# Altium PCB Orient.PcbDoc (part 3 of 4)
Units mil, origin at the board's own origin, x right, y up, seen from the top; angles counter-clockwise.
Board outline 3600 x 2400 mil, 4 copper layers (Top Layer, Layer 1, Layer 2, Bottom Layer), stack 23.756 mil thick; 365 components, 303 nets, 1656 pads, 303 vias.
Unrouted connection lines stored in the file: 1026.
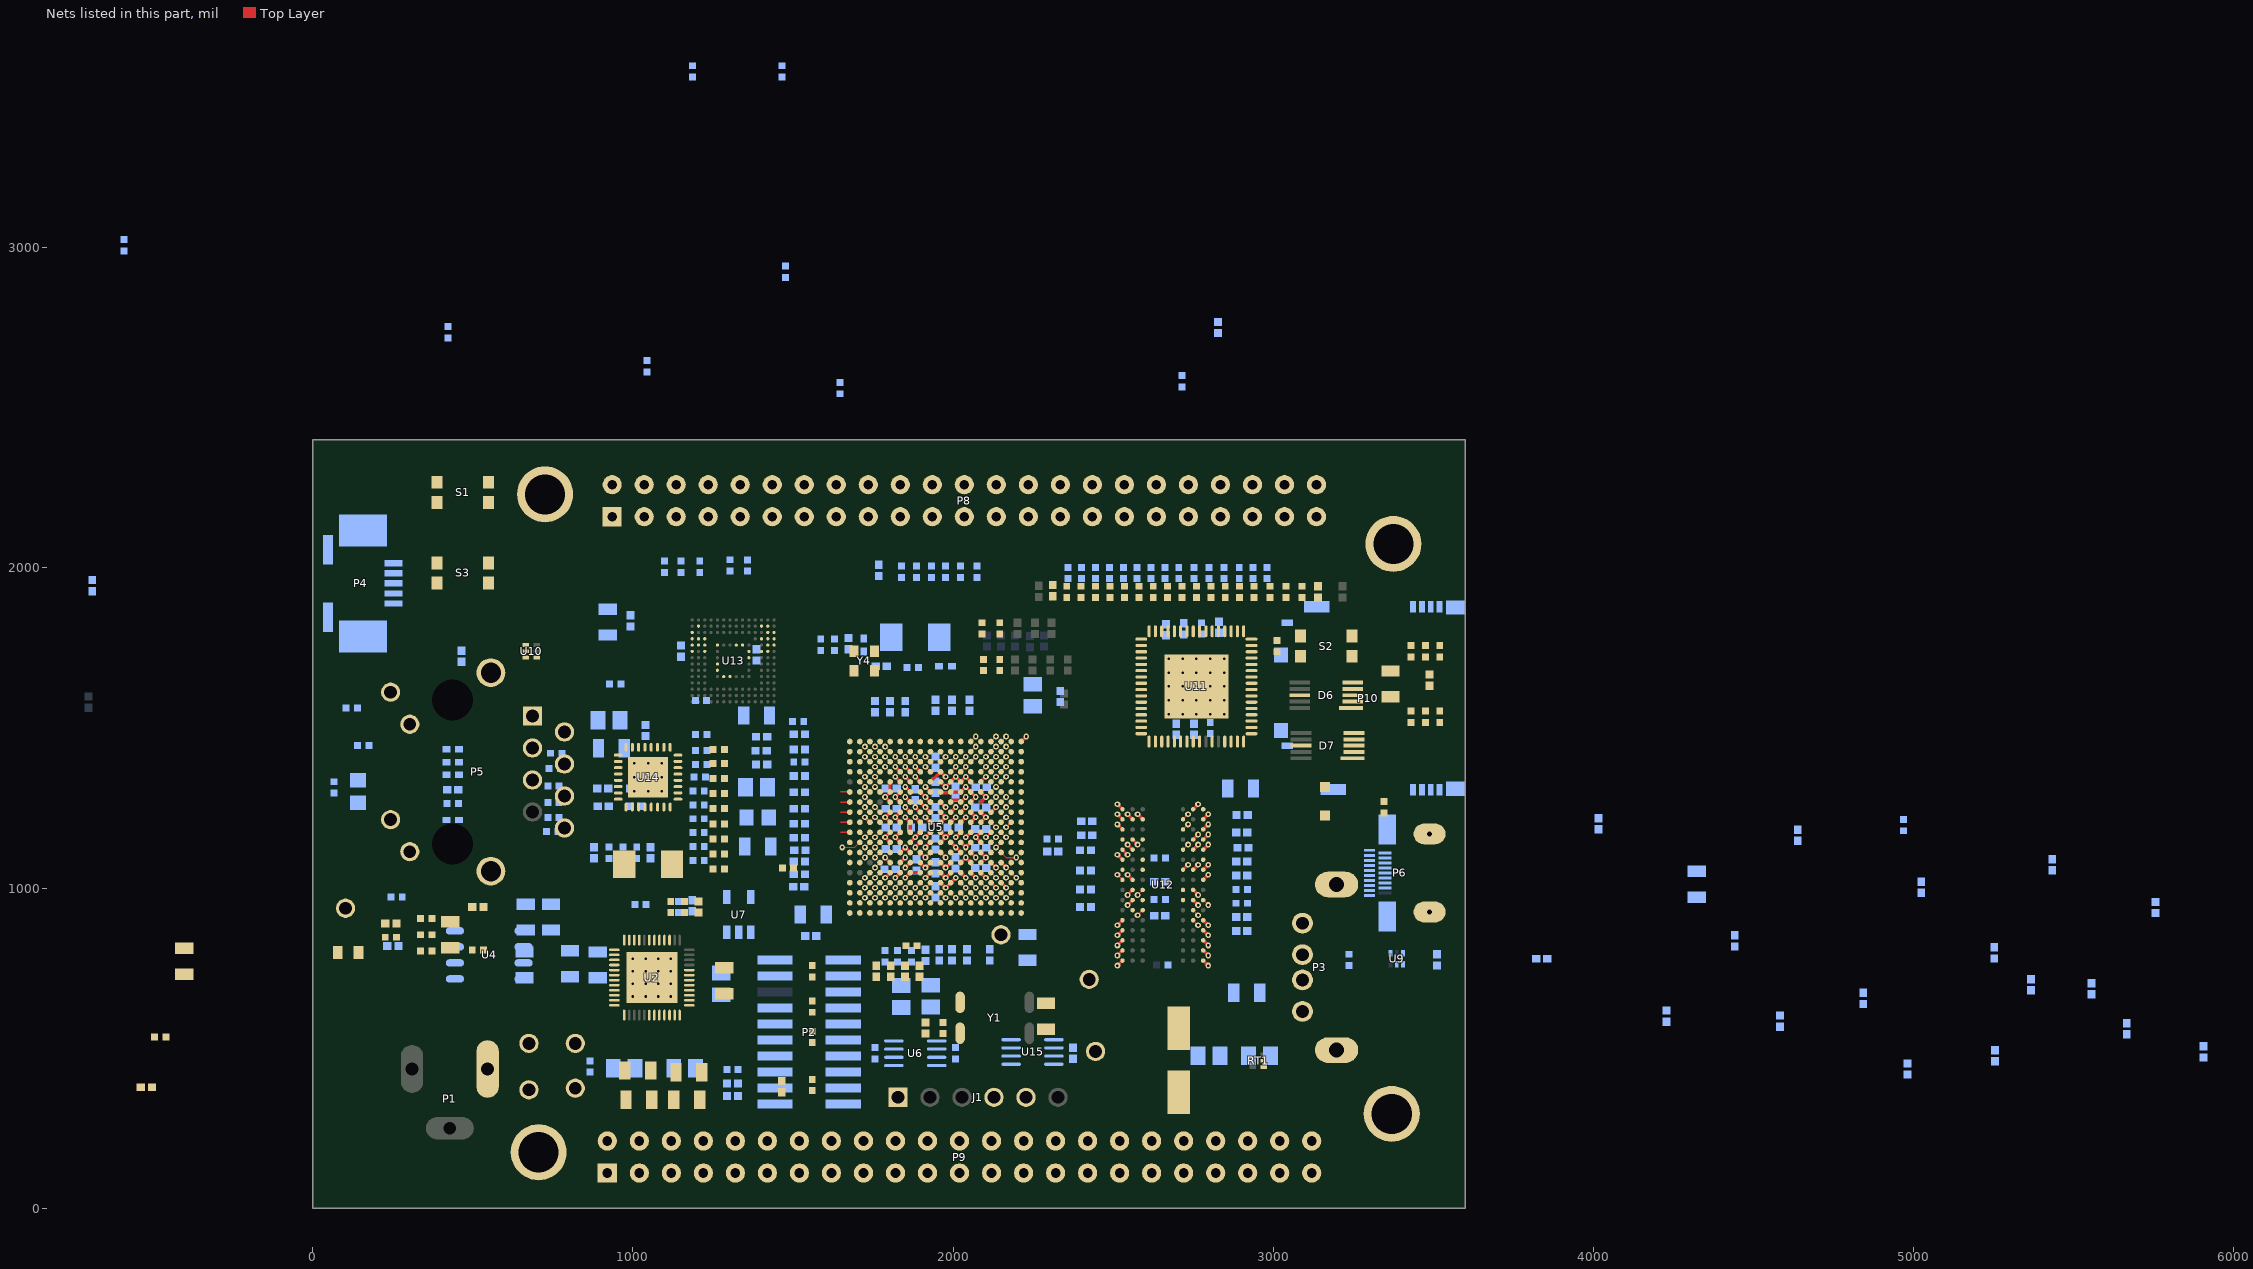
[diagram p4: the nets of this part, all layers, seen from the top]

## Part data (continued)
C16 C17 C18: library part CAP_2.2uF, "MLCC 2.2uF 0402 SMD", Capacitance=2.2uF, Case/Package=0402, Case Code (Metric)=1005, Dielectric=X5R, Dielectric Material=Ceramic, Manufacturer=TDK, Max Operating Temperature=85°C, Min Operating Temperature=-55°C, Package Quantity=1, Tolerance=10%, Voltage=6.3V, Case Code (Imperial)=0402, ComponentLink7Description=Datasheet, ComponentLink7URL=https://product.tdk.com/info/en/catalog/datasheets/mlcc_commercial_general_en.pdf?ref_disty=digikey, Composition=Ceramic, Depth=0.5mm, Height=0.5mm, Lead Free="Lead Free", Length=1mm, Manufacturer Part Number=C1005X5R0J225K050BC, Mount="Surface Mount", Number of Pins=2, Packaging="Tape and Reel", Pricing 1="1=0.20000, 10=0.13800, 100=0.07010, 500=0.04794, 1000=0.04240, 2500=0.04056, 5000=0.03687 (USD)", Radiation Hardening=No, REACH SVHC="No SVHC", RoHS=Yes, Stock 1=256055, Supplier 1=Digi-Key, Termination=SMD/SMT, Thickness=0.022inch, Voltage Rating=6.3V, Voltage Rating (DC)=6.3V, Weight=2.3E-05oz, Width=0.02inch
C17: library part CAP_POL_100uF, "POL CAP 100uF SMD", Capacitance=100uF, Case/Package=Radial, Dielectric Material=Aluminium, Leakage Current=3uA, Manufacturer=Panasonic, Max Operating Temperature=85°C, Min Operating Temperature=-40°C, Package Quantity=1, Ripple Current=71mA, Supplier Part Number 1=PCE3852CT-ND, Tolerance=20%, Voltage=6.3V, ComponentLink1Description=https://datasheet.ciiva.com/11779/0900766b8078636e-11779744.pdf?src-supplier=RSComponents, ComponentLink1URL=https://datasheet.ciiva.com/11779/0900766b8078636e-11779744.pdf?src-supplier=RSComponents, ComponentLink2Description=https://datasheet.ciiva.com/14610/70255710-14610022.pdf?src-supplier=Allied+Electronics, ComponentLink2URL=https://datasheet.ciiva.com/14610/70255710-14610022.pdf?src-supplier=Allied+Electronics, ComponentLink3Description=https://datasheet.ciiva.com/30226/11aba0000ce2-30226184.pdf?src-supplier=Onlinecomponents.com, ComponentLink3URL=https://datasheet.ciiva.com/30226/11aba0000ce2-30226184.pdf?src-supplier=Onlinecomponents.com, ComponentLink4Description=https://datasheet.ciiva.com/16397/aba0000ce2-16397066.pdf?src-supplier=Future+Electronics, ComponentLink4URL=https://datasheet.ciiva.com/16397/aba0000ce2-16397066.pdf?src-supplier=Future+Electronics, ComponentLink5Description=https://datasheet.ciiva.com/46387/aba0000ce2-46387964.pdf?src-supplier=Element14, ComponentLink5URL=https://datasheet.ciiva.com/46387/aba0000ce2-46387964.pdf?src-supplier=Element14, ComponentLink6Description=https://datasheet.ciiva.com/14595/70255710-14595757.pdf?src-supplier=Allied+Electronics, ComponentLink6URL=https://datasheet.ciiva.com/14595/70255710-14595757.pdf?src-supplier=Allied+Electronics, ComponentLink7Description=https://datasheet.ciiva.com/2983/aba0000ce2-2983902.pdf?src-supplier=Avnet, ComponentLink7URL=https://datasheet.ciiva.com/2983/aba0000ce2-2983902.pdf?src-supplier=Avnet, ComponentLink8Description=https://datasheet.ciiva.com/43485/aba0000ce2-43485605.pdf?src-supplier=Farnell, ComponentLink8URL=https://datasheet.ciiva.com/43485/aba0000ce2-43485605.pdf?src-supplier=Farnell, ComponentLink9Description=https://datasheet.ciiva.com/24070/aba0000ce2-40801-24070230.pdf?src-supplier=Mouser, ComponentLink9URL=https://datasheet.ciiva.com/24070/aba0000ce2-40801-24070230.pdf?src-supplier=Mouser, ComponentLink10Description=https://datasheet.ciiva.com/46376/aba0000ce2-46376375.pdf?src-supplier=Element14, ComponentLink10URL=https://datasheet.ciiva.com/46376/aba0000ce2-46376375.pdf?src-supplier=Element14, ComponentLink11Description=https://datasheet.ciiva.com/6134/aba0000ce2-6134361.pdf?src-supplier=Farnell, ComponentLink11URL=https://datasheet.ciiva.com/6134/aba0000ce2-6134361.pdf?src-supplier=Farnell, ComponentLink12Description=https://datasheet.ciiva.com/16539/aba0000ce2-16539929.pdf?src-supplier=Avnet+Asia, ComponentLink12URL=https://datasheet.ciiva.com/16539/aba0000ce2-16539929.pdf?src-supplier=Avnet+Asia, ComponentLink13Description=https://datasheet.ciiva.com/15165/getdatasheetpartid-73778-15165850.pdf?src-supplier=Verical, ComponentLink13URL=https://datasheet.ciiva.com/15165/getdatasheetpartid-73778-15165850.pdf?src-supplier=Verical, ComponentLink14Description=https://datasheet.ciiva.com/17353/aba0000ce2-17353295.pdf?src-supplier=Avnet+Europe, ComponentLink14URL=https://datasheet.ciiva.com/17353/aba0000ce2-17353295.pdf?src-supplier=Avnet+Europe, Contact Plating=Tin, Diameter=6.3mm, Features="General Purpose", Height=5.4mm, Height - Seated (Max)=0.213inch, Lead Free="Lead Free", Lead Length=2.6mm, Lead Pitch=2.2mm, Length=5.5mm, Life (Hours)=2000Hour, Manufacturer Part Number=EEE-0JA101SP, Mount="Surface Mount,PCB", Number of Pins=2, Packaging="Tape and Reel", Pricing 1="1=0.35000, 10=0.24000, 100=0.14420, 500=0.10816 (USD)", Radiation Hardening=No, REACH SVHC="No SVHC", Ripple Current (AC)=71mA, RoHS=Yes, Stock 1=67789, Supplier 1=Digi-Key, Termination=SMD/SMT, Voltage Rating=6.3V, Voltage Rating (DC)=6.3V, Width=6.6mm
C19: library part CAP_470pF, "MLCC 470pF 0402 SMD", Capacitance=470pF, Case/Package=0402, Case Code (Metric)=1005, Dielectric=X7R, Manufacturer=Murata, Max Operating Temperature=125°C, Min Operating Temperature=-55°C, Package Quantity=1, Supplier Part Number 1=490-1300-1-ND, Tolerance=10%, Voltage=50V, Case Code (Imperial)=0402, ComponentLink1Description=https://datasheet.ciiva.com/11786/0900766b80ef921d-11786912.pdf?src-supplier=RSComponents, ComponentLink1URL=https://datasheet.ciiva.com/11786/0900766b80ef921d-11786912.pdf?src-supplier=RSComponents, ComponentLink2Description=https://datasheet.ciiva.com/18101/getdatasheetpartid-37722-18101030.pdf?src-supplier=Verical, ComponentLink2URL=https://datasheet.ciiva.com/18101/getdatasheetpartid-37722-18101030.pdf?src-supplier=Verical, ComponentLink3Description=https://datasheet.ciiva.com/19476/1856505-19476137.pdf?src-supplier=Jameco, ComponentLink3URL=https://datasheet.ciiva.com/19476/1856505-19476137.pdf?src-supplier=Jameco, ComponentLink4Description=https://datasheet.ciiva.com/29199/454340-da-01-en-vs-kondensator-0402-29199656.pdf?src-supplier=Conrad, ComponentLink4URL=https://datasheet.ciiva.com/29199/454340-da-01-en-vs-kondensator-0402-29199656.pdf?src-supplier=Conrad, ComponentLink5Description=https://datasheet.ciiva.com/129/partnumbering-e-01-129843.pdf?src-supplier=Digi-Key, ComponentLink5URL=https://datasheet.ciiva.com/129/partnumbering-e-01-129843.pdf?src-supplier=Digi-Key, ComponentLink6Description=https://datasheet.ciiva.com/129/partnumbering-e-01-129844.pdf?src-supplier=Digi-Key, ComponentLink6URL=https://datasheet.ciiva.com/129/partnumbering-e-01-129844.pdf?src-supplier=Digi-Key, ComponentLink7Description=https://datasheet.ciiva.com/129/partnumbering-e-01-129845.pdf?src-supplier=Digi-Key, ComponentLink7URL=https://datasheet.ciiva.com/129/partnumbering-e-01-129845.pdf?src-supplier=Digi-Key, ComponentLink8Description=https://datasheet.ciiva.com/14116/grmseries-highdielectrictype-eng-14116837.pdf?src-supplier=Distrelec, ComponentLink8URL=https://datasheet.ciiva.com/14116/grmseries-highdielectrictype-eng-14116837.pdf?src-supplier=Distrelec, ComponentLink9Description=https://datasheet.ciiva.com/22698/608985-22698425.pdf?src-supplier=Element14, ComponentLink9URL=https://datasheet.ciiva.com/22698/608985-22698425.pdf?src-supplier=Element14, ComponentLink10Description=https://datasheet.ciiva.com/16199/product-16199180.pdf?src-supplier=Future+Electronics, ComponentLink10URL=https://datasheet.ciiva.com/16199/product-16199180.pdf?src-supplier=Future+Electronics, ComponentLink11Description=https://datasheet.ciiva.com/7937/608985-7937630.pdf?src-supplier=Element14, ComponentLink11URL=https://datasheet.ciiva.com/7937/608985-7937630.pdf?src-supplier=Element14, Depth=0.5mm, Height=0.5mm, Lead Free="Lead Free", Length=1mm, Manufacturer Part Number=GRM155R71H471KA01D, Material=Ceramic, Mount="Surface Mount", Number of Pins=2, Packaging="Tape and Reel", Pricing 1="1=0.10000, 10=0.04900, 100=0.02200, 500=0.01572, 1000=0.01235, 2500=0.01122, 5000=0.01033 (USD)", Radiation Hardening=No, REACH SVHC="No SVHC", RoHS=Yes, Stock 1=1824670, Supplier 1=Digi-Key, Termination=SMD/SMT, Thickness=0.022inch, Voltage Rating=50V, Voltage Rating (DC)=50V, Width=0.02inch
C21 C22 C25: library part CAP_18pF, "CAP CER 18PF 50V 5% NP0 0402", Capacitance=18pF, Manufacturer="TDK Corporation", Manufacturer Part Number=C1005C0G1H180J050BA, Operating Temperature="-55°C ~ 125°C", Package / Case="0402 (1005 Metric)", Ratings=-, Supplier Part Number 1=445-1238-6-ND, Temperature Coefficient="C0G, NP0", Tolerance=±5%, Voltage - Rated=50V, Applications="General Purpose", Category=Capacitors, ComponentLink1Description=http://product.tdk.com/capacitor/mlcc/en/documents/mlcc_commercial_general_en.pdf, ComponentLink1URL=http://product.tdk.com/capacitor/mlcc/en/documents/mlcc_commercial_general_en.pdf, Features=-, Height - Seated (Max)=-, Lead Spacing=-, Lead Style=-, Mounting Type="Surface Mount, MLCC", Packaging=Digi-Reel®, Pricing 1="1=0.1, 10=0.024, 100=0.011, 250=0.009, 500=0.0077, 1000=0.006, 5000=0.005 (USD)", RoHS="RoHS Compliant", Size / Dimension="0.039\" L x 0.020\" W (1.00mm x 0.50mm)", Stock 1=352554, Supplier 1=Digi-Key, Thickness (Max)="0.022\" (0.55mm)"
C24 C89 C90 C91 C104 C134: library part CAP_1uF, "CAP CER 1UF 10V 10% X5R 0402", Capacitance=1.0µF, Manufacturer="AVX Corporation", Manufacturer Part Number=0402ZD105KAT2A, Operating Temperature="-55°C ~ 85°C", Package / Case="0402 (1005 Metric)", Ratings=-, Supplier Part Number 1=478-4596-6-ND, Temperature Coefficient=X5R, Tolerance=±10%, Voltage - Rated=10V, Applications="General Purpose", Category=Capacitors, ComponentLink1Description=http://www.avx.com/docs/Catalogs/cx5r.pdf, ComponentLink1URL=http://www.avx.com/docs/Catalogs/cx5r.pdf, Features=-, Height - Seated (Max)=-, Lead Spacing=-, Lead Style=-, Mounting Type="Surface Mount, MLCC", Packaging=Digi-Reel®, Pricing 1="1=0.3, 10=0.25, 100=0.125, 250=0.09376, 500=0.08282, 1000=0.07344, 5000=0.06094 (USD)", RoHS="RoHS Compliant", Size / Dimension="0.039\" L x 0.020\" W (1.00mm x 0.50mm)", Stock 1=409277, Supplier 1=Digi-Key, Thickness (Max)="0.022\" (0.56mm)"
C26: library part CAP_18PF_COG_50V_5%_0402, "CAP CER 18PF 50V 5% NP0 0402", Capacitance=18pF, Manufacturer="TDK Corporation", Manufacturer Part Number=C1005C0G1H180J050BA, Operating Temperature="-55°C ~ 125°C", Package / Case="0402 (1005 Metric)", Ratings=-, Supplier Part Number 1=445-1238-6-ND, Temperature Coefficient="C0G, NP0", Tolerance=±5%, Voltage - Rated=50V, Applications="General Purpose", Category=Capacitors, ComponentLink1Description=http://product.tdk.com/capacitor/mlcc/en/documents/mlcc_commercial_general_en.pdf, ComponentLink1URL=http://product.tdk.com/capacitor/mlcc/en/documents/mlcc_commercial_general_en.pdf, Features=-, Height - Seated (Max)=-, Lead Spacing=-, Lead Style=-, Mounting Type="Surface Mount, MLCC", Packaging=Digi-Reel®, Pricing 1="1=0.1, 10=0.024, 100=0.011, 250=0.009, 500=0.0077, 1000=0.006, 5000=0.005 (USD)", RoHS="RoHS Compliant", Size / Dimension="0.039\" L x 0.020\" W (1.00mm x 0.50mm)", Stock 1=352554, Supplier 1=Digi-Key, Thickness (Max)="0.022\" (0.55mm)"
C32: library part CAP_1nF, "CAP CER 1000PF 16V 10% X7R 0402", Capacitance=1000pF, Manufacturer=Yageo, Manufacturer Part Number=CC0402KRX7R7BB102, Operating Temperature="-55°C ~ 125°C", Package / Case="0402 (1005 Metric)", Ratings=-, Supplier Part Number 1=311-1352-6-ND, Temperature Coefficient=X7R, Tolerance=±10%, Voltage - Rated=16V, Applications="General Purpose", Category=Capacitors, ComponentLink1Description=http://www.yageo.com/documents/recent/UPY-GPHC_X7R_6.3V-to-50V_8.pdf, ComponentLink1URL=http://www.yageo.com/documents/recent/UPY-GPHC_X7R_6.3V-to-50V_8.pdf, Features=-, Height - Seated (Max)=-, Lead Spacing=-, Lead Style=-, Mounting Type="Surface Mount, MLCC", Packaging=Digi-Reel®, Pricing 1="1=0.1, 10=0.012, 25=0.0088, 100=0.0057, 250=0.00464, 500=0.00396, 1000=0.00309, 2500=0.00278, 5000=0.00258 (USD)", RoHS="RoHS Compliant", Size / Dimension="0.039\" L x 0.020\" W (1.00mm x 0.50mm)", Stock 1=394472, Supplier 1=Digi-Key, Thickness (Max)="0.022\" (0.55mm)"
C39 C55 C62 C77 C95 C96 C118 C122 C126 C133 C153: library part CAP_10uF, "CAP CER 10UF 10V Y5V 0805", Capacitance=10µF, Manufacturer="TDK Corporation", Manufacturer Part Number=C2012Y5V1A106Z, Operating Temperature="-30°C ~ 85°C", Package / Case="0805 (2012 Metric)", Ratings=-, Supplier Part Number 1=445-1371-6-ND, Temperature Coefficient="Y5V (F)", Tolerance="-20%, +80%", Voltage - Rated=10V, Applications="General Purpose", Category=Capacitors, ComponentLink1Description=http://media.digikey.com/pdf/Data%20Sheets/TDK%20PDFs/C_Series_GeneralAppl_B11.pdf, ComponentLink1URL=http://media.digikey.com/pdf/Data%20Sheets/TDK%20PDFs/C_Series_GeneralAppl_B11.pdf, Features=-, Height - Seated (Max)=-, Lead Spacing=-, Lead Style=-, Mounting Type="Surface Mount, MLCC", Packaging=Digi-Reel®, Pricing 1="1=0.15, 10=0.105, 100=0.0499, 250=0.042, 500=0.03518, 1000=0.02887 (USD)", RoHS="RoHS Compliant", Size / Dimension="0.079\" L x 0.049\" W (2.00mm x 1.25mm)", Supplier 1=Digi-Key, Thickness (Max)="0.057\" (1.45mm)"
  C39 C55 C62 C77 C95 C96 C153: Stock 1=111942
  C118 C122 C126 C133: Stock 1=102071
C40: library part CAP_10uF_Y5V_10V_10%_0805, "CAP CER 10UF 10V Y5V 0805", Capacitance=10µF, Manufacturer="TDK Corporation", Manufacturer Part Number=C2012Y5V1A106Z, Operating Temperature="-30°C ~ 85°C", Package / Case="0805 (2012 Metric)", Ratings=-, Supplier Part Number 1=445-1371-6-ND, Temperature Coefficient="Y5V (F)", Tolerance="-20%, +80%", Voltage - Rated=10V, Applications="General Purpose", Category=Capacitors, ComponentLink1Description=http://media.digikey.com/pdf/Data%20Sheets/TDK%20PDFs/C_Series_GeneralAppl_B11.pdf, ComponentLink1URL=http://media.digikey.com/pdf/Data%20Sheets/TDK%20PDFs/C_Series_GeneralAppl_B11.pdf, Features=-, Height - Seated (Max)=-, Lead Spacing=-, Lead Style=-, Mounting Type="Surface Mount, MLCC", Packaging=Digi-Reel®, Pricing 1="1=0.15, 10=0.105, 100=0.0499, 250=0.042, 500=0.03518, 1000=0.02887 (USD)", RoHS="RoHS Compliant", Size / Dimension="0.079\" L x 0.049\" W (2.00mm x 1.25mm)", Stock 1=111942, Supplier 1=Digi-Key, Thickness (Max)="0.057\" (1.45mm)"
C107 C108 C109 C110 C111 C112 C113 C114 C115 C116 C117 C119 C120 C121 C124: library part CAP_100nF, "CAP CER 0.1UF 6.3V 10% X5R 0402", Capacitance=0.1µF, Manufacturer="TDK Corporation", Manufacturer Part Number=C1005X5R0J104K050BA, Operating Temperature="-55°C ~ 85°C", Package / Case="0402 (1005 Metric)", Ratings=-, Supplier Part Number 1=445-1266-6-ND, Temperature Coefficient=X5R, Tolerance=±10%, Voltage - Rated=6.3V, Applications="General Purpose", Category=Capacitors, ComponentLink1Description=http://www.kemet.com/datasheets&C0402C104K4RACTU, ComponentLink1URL=http://www.kemet.com/datasheets&C0402C104K4RACTU, Features=-, Height - Seated (Max)=-, Lead Spacing=-, Lead Style=-, Mounting Type="Surface Mount, MLCC", Packaging=Digi-Reel®, Pricing 1="1=0.1, 10=0.026, 100=0.0121, 250=0.00992, 500=0.00848, 1000=0.0066, 5000=0.0055 (USD)", RoHS="RoHS Compliant", Size / Dimension="0.039\" L x 0.020\" W (1.00mm x 0.50mm)", Stock 1=127604, Supplier 1=Digi-Key, Thickness (Max)="0.022\" (0.55mm)"
C123 C125 C127 C128 C129 C130 C144 C145 C146 C147 C148 C149 C150 C151 C156 C157 C160 C161 C162 C163 C164 C165 C166 C167 C168 C169 C170 C171 C172 C173: library part "CAP SMD", "No Description"
C136: library part CAP_470pF, "CAP CER 470PF 50V 10% X7R 0402", Capacitance=470pF, Manufacturer="Murata Electronics North America", Manufacturer Part Number=GRM155R71H471KA01D, Operating Temperature="-55°C ~ 125°C", Package / Case="0402 (1005 Metric)", Ratings=-, Supplier Part Number 1=490-1300-6-ND, Temperature Coefficient=X7R, Tolerance=±10%, Voltage - Rated=50V, Applications="General Purpose", Category=Capacitors, ComponentLink1Description=http://psearch.murata.com/capacitor/product/GRM155R71H471KA01#.pdf, ComponentLink1URL=http://psearch.murata.com/capacitor/product/GRM155R71H471KA01#.pdf, Features=-, Height - Seated (Max)=-, Lead Spacing=-, Lead Style=-, Mounting Type="Surface Mount, MLCC", Packaging=Digi-Reel®, Pricing 1="1=0.1, 10=0.025, 50=0.0136, 100=0.0116, 250=0.00944, 500=0.00808, 1000=0.0063, 5000=0.00525 (USD)", RoHS="RoHS Compliant", Size / Dimension="0.039\" L x 0.020\" W (1.00mm x 0.50mm)", Stock 1=211618, Supplier 1=Digi-Key, Thickness (Max)="0.022\" (0.55mm)"
C137 C138 C139 C140: library part CAP_0402_100pF_COG_50V, "CAP CER 15PF 50V 5% NP0 0402", Capacitance=15pF, Manufacturer="TDK Corporation", Manufacturer Part Number=C1005C0G1H150J050BA, Operating Temperature="-55°C ~ 125°C", Package / Case="0402 (1005 Metric)", Ratings=-, Supplier Part Number 1=445-1237-6-ND, Temperature Coefficient="C0G, NP0", Tolerance=±5%, Voltage - Rated=50V, Applications="General Purpose", Category=Capacitors, ComponentLink1Description=http://product.tdk.com/capacitor/mlcc/en/documents/mlcc_commercial_general_en.pdf, ComponentLink1URL=http://product.tdk.com/capacitor/mlcc/en/documents/mlcc_commercial_general_en.pdf, Features=-, Height - Seated (Max)=-, Lead Spacing=-, Lead Style=-, Mounting Type="Surface Mount, MLCC", Packaging=Digi-Reel®, Pricing 1="1=0.1, 10=0.024, 100=0.011, 250=0.009, 500=0.0077, 1000=0.006, 5000=0.005 (USD)", RoHS="RoHS Compliant", Size / Dimension="0.039\" L x 0.020\" W (1.00mm x 0.50mm)", Stock 1=233335, Supplier 1=Digi-Key, Thickness (Max)="0.022\" (0.55mm)"
C141: library part CAP_22nF, "CAP CER 0.022UF 10V 10% X7R 0402", Capacitance=0.022µF, Manufacturer="Taiyo Yuden", Manufacturer Part Number=LMK105B7223KV-F, Operating Temperature="-55°C ~ 125°C", Package / Case="0402 (1005 Metric)", Ratings=-, Supplier Part Number 1=587-2476-6-ND, Temperature Coefficient=X7R, Tolerance=±10%, Voltage - Rated=10V, Applications="General Purpose", Category=Capacitors, ComponentLink1Description=http://www.yuden.co.jp/or/product/category/capacitor/LMK105B7223KV-F.pdf, ComponentLink1URL=http://www.yuden.co.jp/or/product/category/capacitor/LMK105B7223KV-F.pdf, Features=-, Height - Seated (Max)=-, Lead Spacing=-, Lead Style=-, Mounting Type="Surface Mount, MLCC", Packaging=Digi-Reel®, Pricing 1="1=0.1, 10=0.013, 50=0.0072, 100=0.0061, 250=0.00496, 500=0.00424, 1000=0.0033, 2500=0.00297, 5000=0.00275 (USD)", RoHS="RoHS Compliant", Size / Dimension="0.039\" L x 0.020\" W (1.00mm x 0.50mm)", Stock 1=11748, Supplier 1=Digi-Key, Thickness (Max)="0.022\" (0.55mm)"
C142 C143: library part CAP_30pF, "CAP CER 30PF 50V 5% NP0 0402", Capacitance=30pF, Manufacturer="TDK Corporation", Manufacturer Part Number=C1005C0G1H300J, Operating Temperature="-55°C ~ 125°C", Package / Case="0402 (1005 Metric)", Ratings=-, Supplier Part Number 1=445-4902-6-ND, Temperature Coefficient="C0G, NP0", Tolerance=±5%, Voltage - Rated=50V, Applications="General Purpose", Category=Capacitors, ComponentLink1Description=http://media.digikey.com/pdf/Data%20Sheets/TDK%20PDFs/C_Series_GeneralAppl_B11.pdf, ComponentLink1URL=http://media.digikey.com/pdf/Data%20Sheets/TDK%20PDFs/C_Series_GeneralAppl_B11.pdf, Features=-, Height - Seated (Max)=-, Lead Spacing=-, Lead Style=-, Mounting Type="Surface Mount, MLCC", Packaging=Digi-Reel®, Pricing 1="1=0.1, 10=0.026, 100=0.0121, 250=0.00992, 500=0.00848, 1000=0.0066, 5000=0.0055 (USD)", RoHS="RoHS Compliant", Size / Dimension="0.039\" L x 0.020\" W (1.00mm x 0.50mm)", Stock 1=120757, Supplier 1=Digi-Key, Thickness (Max)="0.022\" (0.55mm)"
D1: library part LED_LTST-C150GKT, "LED GREEN CLEAR 0805 SMD", Color=Green, Current - Test=20mA, Luminous Flux @ Current - Test=-, Manufacturer="Lite-On Inc", Manufacturer Part Number=LTST-C170KGKT, Millicandela Rating=35mcd, Package / Case="0805 (2012 Metric)", Supplier Part Number 1=160-1414-6-ND, Voltage - Forward (Vf) Typ=2V, Category=Optoelectronics, CLASS=DISCRETE, ComponentLink1Description=http://optoelectronics.liteon.com/en-us/api/DwonloadFileHandler.ashx?txtSpecNo=DS22-2000-073&txtPartNo=LTST-C170KGKT, ComponentLink1URL=http://optoelectronics.liteon.com/en-us/api/DwonloadFileHandler.ashx?txtSpecNo=DS22-2000-073&txtPartNo=LTST-C170KGKT, Height=1.10mm, Lens Style/Size="Rectangle with Flat Top, 1.4mm x 1.25mm", Lens Type=Clear, Mounting Type="Surface Mount", Packaging=Digi-Reel®, Pricing 1="1=0.37, 10=0.267, 100=0.1574, 250=0.11136, 500=0.09504, 1000=0.07425 (USD)", RoHS="RoHS Compliant", Size / Dimension="2.00mm L x 1.25mm W", Stock 1=274890, Supplier 1=Digi-Key, TN=257-0020-000, Viewing Angle=130°, Wavelength - Dominant=571nm, Wavelength - Peak=574nm
D8: library part Zener, "DIODE SCHOTTKY 40V 120MA SOD323", Capacitance @ Vr, F="2pF @ 1V, 1MHz", Current - Average Rectified (Io)="120mA (DC)", Current - Reverse Leakage @ Vr="500nA @ 30V", Manufacturer="NXP Semiconductors", Package / Case="SC-76, SOD-323", Supplier Device Package=SOD-323, Supplier Part Number 1=568-8119-6-ND, Voltage - DC Reverse (Vr) (Max)=40V, Voltage - Forward (Vf) (Max) @ If="370mV @ 1mA", Category="Discrete Semiconductor Products", ComponentLink1Description=http://www.nxp.com/documents/data_sheet/RB751_SER.pdf, ComponentLink1URL=http://www.nxp.com/documents/data_sheet/RB751_SER.pdf, Diode Type=Schottky, Manufacturer Part Number=RB751V40,115, Mounting Type="Surface Mount", Packaging=Digi-Reel®, Pricing 1="1=0.29, 10=0.26, 25=0.1872, 100=0.1456, 250=0.09152, 500=0.07798, 1000=0.05313 (USD)", Reverse Recovery Time (trr)=-, RoHS="RoHS Compliant", Speed="Small Signal =< 200mA (Io), Any Speed", Stock 1=5326, Supplier 1=Digi-Key
FB1 FB2 FB3 FB4 FB7 FB8: library part FERR, "FERRITE 800MA 150 OHM 0805 SMD", Current Rating=800mA, DC Resistance (DCR)="150 mOhm Max", Impedance @ Frequency="150 Ohm @ 100MHz", Manufacturer="Laird-Signal Integrity Products", Manufacturer Part Number=LI0805H151R-10, Mfr=Steward, Package / Case="0805 (2012 Metric)", PartName=FerriteBead150ohm800mA, Supplier Part Number 1=240-2384-6-ND, TIIntPartnumber=1L0010, Category=Filters, ComponentLink1Description=http://www.lairdtech.com/WorkArea/linkit.aspx?LinkIdentifier=id&ItemID=4912, ComponentLink1URL=http://www.lairdtech.com/WorkArea/linkit.aspx?LinkIdentifier=id&ItemID=4912, Filter Type="Differential Mode - Single", Height (Max)="0.043\" (1.10mm)", MfrNum=LI0805H151R-10, Mounting Type="Surface Mount", Packaging=Digi-Reel®, Pricing 1="1=0.1, 10=0.07, 25=0.064, 50=0.0574, 100=0.0421, 250=0.03064, 500=0.02808, 1000=0.02424 (USD)", RoHS="RoHS Compliant", Size / Dimension="0.079\" L x 0.049\" W (2.00mm x 1.25mm)", Stock 1=3694, Supplier 1=Digi-Key, Vendor=Digikey
FB5: library part IND, "FERRITE 800MA 150 OHM 0805 SMD", Current Rating=800mA, DC Resistance (DCR)="150 mOhm Max", Impedance @ Frequency="150 Ohm @ 100MHz", Manufacturer="Laird-Signal Integrity Products", Manufacturer Part Number=LI0805H151R-10, Package / Case="0805 (2012 Metric)", Supplier Part Number 1=240-2384-6-ND, Category=Filters, ComponentLink1Description=http://www.lairdtech.com/WorkArea/linkit.aspx?LinkIdentifier=id&ItemID=4912, ComponentLink1URL=http://www.lairdtech.com/WorkArea/linkit.aspx?LinkIdentifier=id&ItemID=4912, Filter Type="Differential Mode - Single", Height (Max)="0.043\" (1.10mm)", Mounting Type="Surface Mount", Packaging=Digi-Reel®, Pricing 1="1=0.1, 10=0.07, 25=0.064, 50=0.0574, 100=0.0421, 250=0.03064, 500=0.02808, 1000=0.02424 (USD)", RoHS="RoHS Compliant", Size / Dimension="0.079\" L x 0.049\" W (2.00mm x 1.25mm)", Stock 1=10144, Supplier 1=Digi-Key
J1: library part HDR_6x1, "CONN HEADER 6POS, VERTICAL,  .100 STR TIN", Color=Black, Manufacturer="Samtec Inc", Manufacturer Part Number=FTR-110-03-G-D-06, Supplier Part Number 1=FTR-110-03-G-D-06-ND, Category="Connectors, Interconnects", ComponentLink1Description=http://www.samtec.com/documents/webfiles/cpdf/FTR-1XX-XX-XX-D-X-XX-MKT.pdf, ComponentLink1URL=http://www.samtec.com/documents/webfiles/cpdf/FTR-1XX-XX-XX-D-X-XX-MKT.pdf, Connector Type=Unshrouded, Contact Finish=Gold, Contact Finish Thickness="10µin (0.25µm)", Contact Mating Length="0.125\" (3.18mm)", Features=-, Height Stacking (Mating)=-, Molding Height Above Board="0.100\" (2.54mm)", Mounting Type="Surface Mount", Number of Positions=20, Number of Positions Loaded=19, Number of Rows=2, Packaging=Tube, Pitch="0.050\" (1.27mm)", Pricing 1="1=4.47 (USD)", RoHS="RoHS Compliant", Row Spacing="0.100\" (2.54mm)", Stock 1=0, Supplier 1=Digi-Key, Termination=Solder
L1: library part IND, "Inductor 2.2uH smt 2.6A, 58 milliohm", Current - Saturation=-, Current Rating=1.3A, DC Resistance (DCR)="100 mOhm Max", Frequency - Self Resonant=40MHz, Frequency - Test=1MHz, Inductance=2.2µH, Manufacturer="Murata Electronics North America", Manufacturer Part Number=LQM2HPN2R2MG0L, Operating Temperature="-55°C ~ 125°C", Package / Case="1008 (2520 Metric)", Supplier Part Number 1=490-5114-6-ND, Tolerance=±20%, Category="Inductors, Coils, Chokes", ComponentLink1Description=http://search.murata.co.jp/Ceramy/image/img/PDF/ENG/L0075S0104LQM2HP_G0.pdf, ComponentLink1URL=http://search.murata.co.jp/Ceramy/image/img/PDF/ENG/L0075S0104LQM2HP_G0.pdf, Material - Core=-, Mounting Type="Surface Mount", Packaging=Digi-Reel®, Pricing 1="1=0.34, 10=0.307, 25=0.2728, 50=0.2388, 100=0.2217, 250=0.2046, 500=0.19438, 750=0.17732, 1000=0.15686 (USD)", Q @ Freq=-, RoHS="RoHS Compliant", Shielding=Shielded, Size / Dimension="0.098\" L x 0.079\" W x 0.035\" H (2.50mm x 2.00mm x 0.90mm)", Stock 1=4689, Supplier 1=Digi-Key, Type=-
L2 L3: library part IND, "INDUCTOR 2.2UH 20% 1300MA 1008", Current - Saturation=-, Current Rating=1.3A, DC Resistance (DCR)="100 mOhm Max", Frequency - Self Resonant=40MHz, Frequency - Test=1MHz, Inductance=2.2µH, Manufacturer="Murata Electronics North America", Manufacturer Part Number=LQM2HPN2R2MG0L, Mfr=TDK, MfrNum=VLCF5020T-2R2N2R6-3, Operating Temperature="-55°C ~ 125°C", Package / Case="1008 (2520 Metric)", PartName=2.2uH10%2.6Asmd, Supplier Part Number 1=490-5114-6-ND, TIIntPartnumber=1L0025, Tolerance=±20%, Category="Inductors, Coils, Chokes", ComponentLink1Description=http://www.tdk.co.jp/tefe02/e531_vlcf.pdf, ComponentLink1URL=http://www.tdk.co.jp/tefe02/e531_vlcf.pdf, Cost10K=0.37, Cost100=1.11, Material - Core=-, Mounting Type="Surface Mount", Packaging=Digi-Reel®, Pricing 1="1=0.34, 10=0.307, 25=0.2728, 50=0.2388, 100=0.2217, 250=0.2046, 500=0.19438, 750=0.17732, 1000=0.15686 (USD)", Q @ Freq=-, RoHS="RoHS Compliant", Shielding=Shielded, Size / Dimension="0.098\" L x 0.079\" W x 0.035\" H (2.50mm x 2.00mm x 0.90mm)", Stock 1=4689, Supplier 1=Digi-Key, Type=-, Vendor=Digikey
P1: library part Power_Jack, "CONN PWR JACK 2.1X5.5MM HIGH CUR", Color=Black, Current Rating=5A, Manufacturer="CUI Inc", Manufacturer Part Number=PJ-002AH, Operating Temperature="-25°C ~ 85°C", Supplier Part Number 1=CP-002AH-ND, Category="Connectors, Interconnects", ComponentLink1Description=http://www.cui.com/Product/Resource/DigiKeyPDF/PJ-002AH.pdf, ComponentLink1URL=http://www.cui.com/Product/Resource/DigiKeyPDF/PJ-002AH.pdf, Connector Type=Jack, Contact Material="Copper Alloy", Contact Material - Plating=Nickel, Features=-, Gender=Male, Housing Color=Black, Housing Material=Thermoplastic, Internal Switch(s)="Single Switch, Normally Closed", Mounting Type="Through Hole, Right Angle", Number of Positions/Contacts="2 Conductors, 3 Contacts", Plug/Mating Plug Diameter="2.1mm ID, 5.5mm OD", Pricing 1="1=1.01, 10=0.704, 100=0.4724, 500=0.3819, 1000=0.3417, 2500=0.27135 (USD)", RoHS="RoHS Compliant", Shielding=Unshielded, Stock 1=81962, Supplier 1=Digi-Key, Termination="Solder Eyelet(s)"
P2: library part HDR_10x2_CJTAG, "Dual Line Header 10x2pin Tin", Color=Black, Manufacturer="Samtec Inc", Manufacturer Part Number=FTR-110-03-G-D-06, Supplier Part Number 1=FTR-110-03-G-D-06-ND, Category="Connectors, Interconnects", ComponentLink1Description=http://www.samtec.com/documents/webfiles/cpdf/FTR-1XX-XX-XX-D-X-XX-MKT.pdf, ComponentLink1URL=http://www.samtec.com/documents/webfiles/cpdf/FTR-1XX-XX-XX-D-X-XX-MKT.pdf, Connector Type=Unshrouded, Contact Finish=Gold, Contact Finish Thickness="10µin (0.25µm)", Contact Mating Length="0.125\" (3.18mm)", Features=-, Height Stacking (Mating)=-, Molding Height Above Board="0.100\" (2.54mm)", Mounting Type="Surface Mount", Number of Positions=20, Number of Positions Loaded=19, Number of Rows=2, Packaging=Tube, Pitch="0.050\" (1.27mm)", Pricing 1="1=4.47 (USD)", RoHS="RoHS Compliant", Row Spacing="0.100\" (2.54mm)", Stock 1=0, Supplier 1=Digi-Key, Termination=Solder
P3: library part CONN_USBA, "CONN RCPT USB TYPE A R/A PCB", Manufacturer=FCI, Manufacturer Part Number=87520-0010BLF, Supplier Part Number 1=609-1045-ND, Category="Connectors, Interconnects", CLASS=IO, ComponentLink1Description=http://portal.fciconnect.com/Comergent//fci/drawing/87520.pdf, ComponentLink1URL=http://portal.fciconnect.com/Comergent//fci/drawing/87520.pdf, Connector Type="USB - A", Features="Board Lock", Gender=Receptacle, Ingress Protection=-, Mounting Type="Through Hole, Right Angle, Horizontal", Number of Contacts=4, Packaging=Tube, Pricing 1="1=0.78, 10=0.734, 25=0.6604, 50=0.587, 100=0.5626, 250=0.51368, 500=0.4892, 1000=0.40359, 2500=0.3669 (USD)", RoHS="RoHS Compliant", Specifications="USB 2.0", Stock 1=4363, Supplier 1=Digi-Key, TN=224-0234-000
P4: library part MINI-USB-AB-SOCKET, "CONN RCPT USB MINI B R/A SMD", Manufacturer=KYCON, Manufacturer 2=AMP, Manufacturer Part Number=0565790576, Supplier Part Number 1=WM17122DKR-ND, ATLStockNo1=4500.0223, Category="Connectors, Interconnects", ComponentLink1Description=http://www.molex.com/pdm_docs/sd/565790576_sd.pdf, ComponentLink1URL=http://www.molex.com/pdm_docs/sd/565790576_sd.pdf, Connector Type="USB - mini AB", Distributor=Deltron, Distributor 2=Tyco, Features=Shielded, Gender=Receptacle, Ingress Protection=-, Mounting Type="Surface Mount, Right Angle, Horizontal", Number of Contacts=5, Order#=KMAB-SMT-5S-S-30TR, Order# 2=C-440247, Packaging=Digi-Reel®, Pricing 1="1=2.92, 10=2.649, 25=2.4872, 50=2.3792, 100=2.271, 250=2.05468 (USD)", RoHS="RoHS Compliant", Specifications="USB 2.0 OTG", Stock 1=12426, Supplier 1=Digi-Key
P5: library part CONN_RJ45_MAG_WE_0, "WE-RJ45 LAN Transformer"
P6: library part "Micro HDMI", "CONN HDMI RECPT 19POS SMT R/A", Manufacturer=FCI, Supplier Part Number 1=609-4615-6-ND, Category="Connectors, Interconnects", ComponentLink1Description=http://portal.fciconnect.com/Comergent//fci/drawing/10118241.pdf, ComponentLink1URL=http://portal.fciconnect.com/Comergent//fci/drawing/10118241.pdf, Connector Type=HDMI, Features="Shielded, Solder Retention", Gender=Receptacle, Ingress Protection=-, Manufacturer Part Number=10118241-001RLF, Mounting Type="Surface Mount, Right Angle, Horizontal", Number of Contacts=19, Packaging=Digi-Reel®, Pricing 1="1=1.34, 10=1.174, 25=1.1052, 50=1.059, 100=1.013, 250=0.92092 (USD)", RoHS="RoHS Compliant", Specifications=-, Stock 1=6779, Supplier 1=Digi-Key
P8 P9: library part HDR_46_F_2_0.1_0.1, "CONN HEADER FMAL 46PS.1\" DL GOLD", Color=Black, Manufacturer="Sullins Connector Solutions", Manufacturer Part Number=PPPC232LFBN-RC, Supplier Part Number 1=S7126-ND, Category="Connectors, Interconnects", ComponentLink1Description=http://www.sullinscorp.com/drawings/78_P(N)PxCxxxLFBN-RC,_10492-G.pdf, ComponentLink1URL=http://www.sullinscorp.com/drawings/78_P(N)PxCxxxLFBN-RC,_10492-G.pdf, Connector Type=Header, Contact Finish=Gold, Contact Finish Thickness=Flash, Contact Type="Female Socket", Fastening Type=-, Features=-, Mounting Type="Through Hole", Number of Positions=46, Number of Positions Loaded=All, Number of Rows=2, Packaging=Bulk, Pitch="0.100\" (2.54mm)", Pricing 1="1=2.75, 10=2.325, 25=2.2196, 50=2.0084, 100=1.7969, 250=1.58552, 500=1.4798, 1000=1.3741, 2500=1.32125 (USD)", RoHS="RoHS Compliant", Row Spacing="0.100\" (2.54mm)", Stock 1=750, Supplier 1=Digi-Key, Termination=Solder
P10: library part microSD_CONN_2, "CONN MICRO SD R/A PUSH-PUSH SMD", Manufacturer="Molex Inc", Manufacturer Part Number=5025700893, Supplier Part Number 1=WM19093TR-ND, Card Type="Secure Digital - microSD™ TransFlash", Category="Connectors, Interconnects", ComponentLink1Description=http://www.molex.com/pdm_docs/sd/5025700893_sd.pdf, ComponentLink1URL=http://www.molex.com/pdm_docs/sd/5025700893_sd.pdf, Connector Type="Connector and Ejector", Contact Finish=Gold, Contact Finish Thickness="20µin (0.51µm)", Ejector Side=-, Features=Switch, Height Above Board="0.071\" (1.80mm)", Insertion, Removal Method="Push In, Push Out", Mounting Feature="Normal, Standard - Top", Mounting Type="Surface Mount, Right Angle", Number of Positions="10 (8 + 2)", Packaging="Tape & Reel (TR)", Pricing 1="1300=2.16645, 2600=2.01703, 6500=1.94233 (USD)", RoHS="RoHS Compliant", Stock 1=16900, Supplier 1=Digi-Key
R1 R165: library part RES_100k, "Resistor 100kOhm 0402 SMD", Case/Package=0402, Case Code (Metric)=1005, Manufacturer=Yageo, Max Operating Temperature=155°C, Max Power Dissipation=63mW, Min Operating Temperature=-55°C, Package Quantity=1, Resistance=100k, Supplier Part Number 1=603-RC0402FR-07100KL, Temperature Coefficient=100ppm/°C, Tolerance=1%, Voltage Rating=50V, Case Code (Imperial)=0402, ComponentLink2Description=Datasheet, ComponentLink2URL=https://www.yageo.com/upload/media/product/productsearch/datasheet/rchip/PYu-RC_Group_51_RoHS_L_10.pdf, Composition="Thick Film", Depth=0.5mm, Features="Moisture Resistant", Height=0.016inch, Lead Free="Lead Free", Length=0.039inch, Manufacturer Part Number=RC0402FR-07100KL, Military Standard=Not, Number of Terminations=2, Packaging="Tape and Reel", Power Rating=63mW, REACH SVHC="No SVHC", RoHS=Yes, Supplier 1=Mouser, Supplier 2=Digi-Key, Supplier Part Number 2=311-100KLRCT-ND, Termination=SMD/SMT, Width=0.02inch, Working Voltage=50V
R3 R4: library part RES_1.5k, "Resistor 1.5kOhm 0402 SMD", Case/Package=0402, Case Code (Metric)=1005, Manufacturer=Yageo, Max Operating Temperature=155°C, Max Power Dissipation=63mW, Min Operating Temperature=-55°C, Package Quantity=1, Power Rating=62.5mW, Resistance=1.5k, Supplier Part Number 1=311-1.50KLRCT-ND, Temperature Coefficient=100ppm/°C, Tolerance=1%, Voltage Rating=50V, Case Code (Imperial)=0402, ComponentLink1Description=Datasheet, ComponentLink1URL=https://www.yageo.com/upload/media/product/productsearch/datasheet/rchip/PYu-RC_Group_51_RoHS_L_10.pdf, Composition="Thick Film", Depth=0.5mm, Features="Moisture Resistant", Height=0.016inch, Lead Free="Lead Free", Length=1mm, Manufacturer Part Number=RC0402FR-071K5L, Military Standard=Not, Number of Terminations=2, Packaging="Tape and Reel", REACH SVHC="No SVHC", RoHS=Yes, Supplier 1=Digi-Key, Supplier 2=Mouser, Supplier Part Number 2=603-RC0402FR-071K5L, Termination=SMD/SMT, Width=0.02inch
R5 R6 R7 R8 R9 R19 R20 R27 R49 R50 R51 R159 R160 R161 R162: library part RES_0, "Resistor 0Ohm 0402 SMD", Case/Package=0402, Case Code (Metric)=1005, Manufacturer=Yageo, Max Operating Temperature=155°C, Max Power Dissipation=63mW, Min Operating Temperature=-55°C, Package Quantity=1, Power Rating=62.5mW, Resistance=0, Supplier Part Number 1=311-0.0JRCT-ND, Temperature Coefficient=200ppm/°C, Tolerance=5%, Voltage Rating=50V, Case Code (Imperial)=0402, ComponentLink1Description=Digikey, ComponentLink1URL=https://www.digikey.com/product-detail/en/yageo/RC0402JR-070RL/311-0.0JRCT-ND/729353, ComponentLink2Description=Datasheet, ComponentLink2URL=https://www.yageo.com/upload/media/product/productsearch/datasheet/rchip/PYu-RC_Group_51_RoHS_L_10.pdf, Composition="Thick Film", Contact Plating=Tin,Matte, Depth=0.5mm, Features="Moisture Resistant", Height=0.016inch, Lead Free="Lead Free", Length=1mm, Manufacturer Part Number=RC0402JR-070RL, Military Standard=Not, Number of Terminations=2, Packaging="Tape and Reel", Pricing 1="1=0.10000, 10=0.01300, 25=0.00920, 50=0.00700, 100=0.00510, 250=0.00392, 500=0.00312, 1000=0.00230, 5000=0.00165 (USD)", Radiation Hardening=No, REACH SVHC=Unknown, RoHS=Yes, Stock 1=68160806, Supplier 1=Digi-Key, Termination=SMD/SMT, Width=0.02inch
R10: library part RES_470k, "Resistor 470kOhm 0402 SMD", Case/Package=0402, Case Code (Metric)=1005, Manufacturer=Yageo, Max Operating Temperature=155°C, Max Power Dissipation=63mW, Min Operating Temperature=-55°C, Package Quantity=1, Power Rating=62.5mW, Resistance=470k, Supplier Part Number 1=311-470KLRCT-ND, Temperature Coefficient=100ppm/°C, Tolerance=1%, Voltage Rating=50V, Case Code (Imperial)=0402, ComponentLink1Description=Datasheet, ComponentLink1URL=https://www.yageo.com/upload/media/product/productsearch/datasheet/rchip/PYu-RC_Group_51_RoHS_L_10.pdf, Composition="Thick Film", Depth=0.5mm, Features="Moisture Resistant", Height=0.016inch, Lead Free="Lead Free", Length=1mm, Manufacturer Part Number=RC0402FR-07470KL, Military Standard=Not, Number of Pins=2, Number of Terminations=2, Packaging="Tape and Reel", Pricing 1="1=0.10000, 10=0.01600, 100=0.00640, 1000=0.00289, 2500=0.00251, 5000=0.00207 (USD)", REACH SVHC="No SVHC", RoHS=Yes, Stock 1=2249859, Supplier 1=Digi-Key, Termination=SMD/SMT, Voltage Rating (DC)=50V, Width=0.02inch
R11: library part RES_280k, "Resistor 280kOhm 0402 SMD", Case/Package=0402, Case Code (Metric)=1005, Manufacturer=Yageo, Max Operating Temperature=155°C, Max Power Dissipation=63mW, Min Operating Temperature=-55°C, Power Rating=62.5mW, Resistance=280k, Supplier Part Number 1=YAG3087CT-ND, Temperature Coefficient=100ppm/°C, Tolerance=1%, Voltage Rating=50V, Case Code (Imperial)=0402, ComponentLink1Description=Datasheet, ComponentLink1URL=https://www.yageo.com/upload/media/product/productsearch/datasheet/rchip/PYu-RC_Group_51_RoHS_L_10.pdf, Composition="Thick Film", Contact Plating=Tin,Matte,Lead, Depth=0.5mm, Features="Moisture Resistant", Height=0.016inch, Lead Free="Lead Free", Length=1mm, Manufacturer Part Number=RC0402FR-07280KL, Military Standard=Not, Number of Terminations=2, Packaging="Tape and Reel", Pricing 1="1=0.10000, 10=0.01600, 100=0.00640, 1000=0.00289, 2500=0.00251, 5000=0.00207 (USD)", Radiation Hardening=No, RoHS=Yes, Stock 1=1301983, Supplier 1=Digi-Key, Termination=SMD/SMT, Voltage Rating (DC)=50V, Width=0.5mm
R12: library part RES_820, "Resistor 820Ohm 0402 SMD", Case/Package=0402, Case Code (Metric)=1005, Manufacturer=Yageo, Max Operating Temperature=155°C, Max Power Dissipation=63mW, Min Operating Temperature=-55°C, Package Quantity=1, Resistance=820, Supplier Part Number 1=311-820LRCT-ND, Temperature Coefficient=100ppm/°C, Tolerance=1%, Voltage Rating=50V, Case Code (Imperial)=0402, Composition="Thick Film", Depth=0.5mm, Features="Moisture Resistant", Height=0.016inch, Lead Free="Lead Free", Length=1mm, Manufacturer Part Number=RC0402FR-07820RL, Military Standard=Not, Number of Terminations=2, Packaging="Tape and Reel", Power Rating=63mW, Pricing 1="1=0.10000, 10=0.01600, 100=0.00640, 1000=0.00289, 2500=0.00251, 5000=0.00207 (USD)", REACH SVHC=Unknown, RoHS=Yes, Stock 1=1640857, Supplier 1=Digi-Key, Termination=SMD/SMT, Width=0.5mm
R14 R52 R53 R54 R96 R98 R100 R101 R102 R103 R104 R105 R106 R107 R108 R109 R110 R111 R115 R116 R117 R118 R135 R145 R148 R150 R151 R152 R153 R154 R155 R156 R157 R158: library part RES_10k, "RES 10K OHM 1/16W 5% 0402 SMD", Manufacturer="Rohm Semiconductor", Manufacturer Part Number=MCR01MZPJ103, Package / Case="0402 (1005 Metric)", Power (Watts)="0.063W, 1/16W", Resistance (Ohms)=10k, Supplier Part Number 1=RHM10KJDKR-ND, Temperature Coefficient=±200ppm/°C, Tolerance=±5%, Category=Resistors, ComponentLink1Description=http://rohmfs.rohm.com/en/products/databook/datasheet/passive/resistor/chip_resistor/mcr_a.pdf, ComponentLink1URL=http://rohmfs.rohm.com/en/products/databook/datasheet/passive/resistor/chip_resistor/mcr_a.pdf, Composition="Thick Film", Features="Automotive AEC-Q200 Qualified", Height="0.016\" (0.40mm)", Number of Terminations=2, Packaging=Digi-Reel®, Pricing 1="1=0.1, 10=0.019, 25=0.014, 100=0.0078, 250=0.00596, 500=0.00476, 1000=0.0035, 5000=0.00251 (USD)", RoHS="RoHS Compliant", Size / Dimension="0.039\" L x 0.020\" W (1.00mm x 0.50mm)", Supplier 1=Digi-Key, Supplier Device Package="0402 (1005 Metric)"
  R14 R54 R96 R98 R100 R101 R102 R103 R104 R105 R106 R107 R108 R109 R110 R111 R115 R116 R117 R118 R135 R145 R150 R151 R152 R153 R154 R155 R156 R157: Stock 1=110842
  R52 R53: Stock 1=452072
  R148 R158: Stock 1=460442
R17: library part RES_1M, "Resistor 1Mohm 1/16W 1% 0402", Manufacturer="Stackpole Electronics Inc", Manufacturer Part Number=RMCF0402FT1M00, Package / Case="0402 (1005 Metric)", Power (Watts)="0.063W, 1/16W", Resistance (Ohms)=1M, Supplier Device Package=0402, Supplier Part Number 1=RMCF0402FT1M00DKR-ND, Temperature Coefficient=±100ppm/°C, Tolerance=±1%, Category=Resistors, ComponentLink1Description=http://www.seielect.com/Catalog/SEI-RMCF_RMCP.pdf, ComponentLink1URL=http://www.seielect.com/Catalog/SEI-RMCF_RMCP.pdf, Composition="Thick Film", Features=-, Height="0.016\" (0.40mm)", Number of Terminations=2, Packaging=Digi-Reel®, Pricing 1="1=0.04, 10=0.025, 50=0.0138, 100=0.0105, 250=0.0078, 500=0.00576, 1000=0.00384, 2500=0.00324, 5000=0.0027 (USD)", RoHS="RoHS Compliant", Size / Dimension="0.039\" L x 0.020\" W (1.00mm x 0.50mm)", Stock 1=175650, Supplier 1=Digi-Key
R18 R21: library part RES_33, "RES 33 OHM 1/16W 5% 0402 SMD", Manufacturer="Panasonic Electronic Components", Manufacturer Part Number=ERJ-2GEJ330X, Package / Case="0402 (1005 Metric)", Power (Watts)="0.1W, 1/10W", Resistance (Ohms)=33, Supplier Device Package=0402, Supplier Part Number 1=P33JDKR-ND, Temperature Coefficient=±200ppm/°C, Tolerance=±5%, Category=Resistors, ComponentLink1Description=http://industrial.panasonic.com/www-cgi/jvcr13pz.cgi?E+PZ+3+AOA0001+ERJ2GEJ330X+7+WW, ComponentLink1URL=http://industrial.panasonic.com/www-cgi/jvcr13pz.cgi?E+PZ+3+AOA0001+ERJ2GEJ330X+7+WW, Composition="Thick Film", Features=-, Height="0.016\" (0.40mm)", Number of Terminations=2, Packaging=Digi-Reel®, Pricing 1="1=0.1, 50=0.0172, 100=0.0131, 250=0.00976, 500=0.0072, 1000=0.0048, 5000=0.00338 (USD)", RoHS="RoHS Compliant", Size / Dimension="0.039\" L x 0.020\" W (1.00mm x 0.50mm)", Stock 1=5879945, Supplier 1=Digi-Key
R22 R120 R121 R122 R123: library part RES_49.9, "RES 49.9 OHM 1/16W 1% 0402 SMD", Manufacturer=Yageo, Manufacturer Part Number=RC0402FR-0749R9L, Package / Case="0402 (1005 Metric)", Power (Watts)="0.063W, 1/16W", Resistance (Ohms)=49.9, Supplier Device Package=0402, Supplier Part Number 1=311-49.9LRDKR-ND, Temperature Coefficient=±100ppm/°C, Tolerance=±1%, Category=Resistors, ComponentLink1Description=http://www.yageo.com/documents/recent/PYu-RC0402_51_RoHS_L_6.pdf, ComponentLink1URL=http://www.yageo.com/documents/recent/PYu-RC0402_51_RoHS_L_6.pdf, Composition="Thick Film", Features=-, Height="0.016\" (0.40mm)", Number of Terminations=2, Packaging=Digi-Reel®, Pricing 1="1=0.1, 10=0.014, 25=0.0104, 100=0.0063, 250=0.0054, 500=0.00382, 1000=0.0027, 2500=0.00234, 5000=0.00203 (USD)", RoHS="RoHS Compliant", Size / Dimension="0.039\" L x 0.020\" W (1.00mm x 0.50mm)", Stock 1=1338786, Supplier 1=Digi-Key
R23 R24 R25: library part RES_4.75k, "RES 4.75K 1/16W 1% 0402 SMD", Manufacturer="Stackpole Electronics Inc", Manufacturer Part Number=RMCF0402FT4K75, Package / Case="0402 (1005 Metric)", Power (Watts)="0.063W, 1/16W", Resistance (Ohms)=4.75k, Supplier Device Package=0402, Supplier Part Number 1=RMCF0402FT4K75DKR-ND, Temperature Coefficient=±100ppm/°C, Tolerance=±1%, Category=Resistors, ComponentLink1Description=http://www.seielect.com/Catalog/SEI-RMCF_RMCP.pdf, ComponentLink1URL=http://www.seielect.com/Catalog/SEI-RMCF_RMCP.pdf, Composition="Thick Film", Features=-, Height="0.016\" (0.40mm)", Number of Terminations=2, Packaging=Digi-Reel®, Pricing 1="1=0.04, 10=0.025, 50=0.0138, 100=0.0105, 250=0.0078, 500=0.00576, 1000=0.00384, 2500=0.00324, 5000=0.0027 (USD)", RoHS="RoHS Compliant", Size / Dimension="0.039\" L x 0.020\" W (1.00mm x 0.50mm)", Stock 1=280611, Supplier 1=Digi-Key
R26 R163 R164: library part RES_4.75k, "RES 4.75K OHM 1/16W 1% 0402 SMD", Manufacturer="Stackpole Electronics Inc", Manufacturer Part Number=RMCF0402FT4K75, Package / Case="0402 (1005 Metric)", Power (Watts)="0.063W, 1/16W", Resistance (Ohms)=4.75k, Supplier Device Package=0402, Supplier Part Number 1=RMCF0402FT4K75DKR-ND, Temperature Coefficient=±100ppm/°C, Tolerance=±1%, Category=Resistors, ComponentLink1Description=http://www.seielect.com/Catalog/SEI-RMCF_RMCP.pdf, ComponentLink1URL=http://www.seielect.com/Catalog/SEI-RMCF_RMCP.pdf, Composition="Thick Film", Features=-, Height="0.016\" (0.40mm)", Number of Terminations=2, Packaging=Digi-Reel®, Pricing 1="1=0.04, 10=0.025, 50=0.0138, 100=0.0105, 250=0.0078, 500=0.00576, 1000=0.00384, 2500=0.00324, 5000=0.0027 (USD)", RoHS="RoHS Compliant", Size / Dimension="0.039\" L x 0.020\" W (1.00mm x 0.50mm)", Stock 1=280917, Supplier 1=Digi-Key
R28 R45 R46 R47 R48: library part RES_33, "Resistor 33Ohm 0402 SMD", Case/Package=0402, Case Code (Metric)=1005, Manufacturer=Yageo, Max Operating Temperature=155°C, Min Operating Temperature=-55°C, Package Quantity=10000, Power Rating=62.5mW, Resistance=33, Temperature Coefficient=100ppm/°C, Tolerance=1%, Voltage Rating=50V, Case Code (Imperial)=0402, ComponentLink1Description=https://datasheet.ciiva.com/11819/0900766b80c66297-11819487.pdf?src-supplier=RSComponents, ComponentLink1URL=https://datasheet.ciiva.com/11819/0900766b80c66297-11819487.pdf?src-supplier=RSComponents, ComponentLink2Description=https://datasheet.ciiva.com/15189/getdatasheetpartid-329253-15189431.pdf?src-supplier=Verical, ComponentLink2URL=https://datasheet.ciiva.com/15189/getdatasheetpartid-329253-15189431.pdf?src-supplier=Verical, ComponentLink3Description=https://datasheet.ciiva.com/24070/pyu-rc0402-51-rohs-l-6-r-8721-24070077.pdf?src-supplier=Mouser, ComponentLink3URL=https://datasheet.ciiva.com/24070/pyu-rc0402-51-rohs-l-6-r-8721-24070077.pdf?src-supplier=Mouser, ComponentLink4Description=https://datasheet.ciiva.com/7849/1018594-7849966.pdf?src-supplier=Element14, ComponentLink4URL=https://datasheet.ciiva.com/7849/1018594-7849966.pdf?src-supplier=Element14, ComponentLink5Description=https://datasheet.ciiva.com/7849/1018594-7849967.pdf?src-supplier=Element14, ComponentLink5URL=https://datasheet.ciiva.com/7849/1018594-7849967.pdf?src-supplier=Element14, ComponentLink6Description=https://datasheet.ciiva.com/17070/pyu-rc0402-51-rohs-l-6-r-17070335.pdf?src-supplier=Future+Electronics, ComponentLink6URL=https://datasheet.ciiva.com/17070/pyu-rc0402-51-rohs-l-6-r-17070335.pdf?src-supplier=Future+Electronics, Composition="Thick Film", Depth=0.5mm, Height=0.35mm, Lead Free="Lead Free", Length=1mm, Manufacturer Part Number=RC0402FR-0733RL, Military Standard=Not, Number of Pins=2, Packaging="Tape and Reel", Pricing 1="1=0.10000, 10=0.01600, 100=0.00640, 1000=0.00289, 2500=0.00251, 5000=0.00207 (USD)", REACH SVHC=Unknown, RoHS=Yes, Stock 1=5631148, Supplier 1=Digi-Key, Termination=SMD/SMT, Voltage Rating (DC)=50V, Width=0.5mm
R55 R56 R57 R58 R59 R60 R61 R62 R63 R64 R65 R66 R67 R68 R69 R70 R80 R81 R82 R83 R84 R85 R86 R87 R88 R89 R90 R91 R92 R93 R94 R95: library part RES_100k, "RES 100K OHM 1/16W 1% 0402 SMD", Manufacturer="Stackpole Electronics Inc", Manufacturer Part Number=RMCF0402FT100K, Package / Case="0402 (1005 Metric)", Power (Watts)="0.063W, 1/16W", Resistance (Ohms)=100k, Supplier Device Package=0402, Supplier Part Number 1=RMCF0402FT100KDKR-ND, Temperature Coefficient=±100ppm/°C, Tolerance=±1%, Category=Resistors, ComponentLink1Description=http://www.seielect.com/Catalog/SEI-RMCF_RMCP.pdf, ComponentLink1URL=http://www.seielect.com/Catalog/SEI-RMCF_RMCP.pdf, Composition="Thick Film", Features=-, Height="0.016\" (0.40mm)", Number of Terminations=2, Packaging=Digi-Reel®, Pricing 1="1=0.04, 10=0.025, 50=0.0138, 100=0.0105, 250=0.0078, 500=0.00576, 1000=0.00384, 2500=0.00324, 5000=0.0027 (USD)", RoHS="RoHS Compliant", Size / Dimension="0.039\" L x 0.020\" W (1.00mm x 0.50mm)", Stock 1=851196, Supplier 1=Digi-Key
R75: library part RES_100, "RES 100 OHM 1/10W 5% 0402 SMD", Manufacturer="Panasonic Electronic Components", Manufacturer Part Number=ERJ-2RKF1000X, Package / Case="0402 (1005 Metric)", Power (Watts)="0.1W, 1/10W", Supplier Device Package=0402, Supplier Part Number 1=P100LDKR-ND, Temperature Coefficient=±100ppm/°C, Category=Resistors, ComponentLink1Description=http://industrial.panasonic.com/www-cgi/jvcr13pz.cgi?E+PZ+3+AOA0002+ERJ2RKF1000X+7+WW, ComponentLink1URL=http://industrial.panasonic.com/www-cgi/jvcr13pz.cgi?E+PZ+3+AOA0002+ERJ2RKF1000X+7+WW, Composition="Thick Film", Features=-, Height="0.016\" (0.40mm)", Number of Terminations=2, Packaging=Digi-Reel®, Pricing 1="1=0.1, 50=0.0242, 100=0.0184, 250=0.01364, 500=0.01008, 1000=0.00672, 5000=0.00473 (USD)", Resistance (Ohms)=100, RoHS=RoHS, Size / Dimension="0.039\" L x 0.020\" W (1.00mm x 0.50mm)", Stock 1=2375521, Supplier 1=Digi-Key

## Text inside footprints (layer, text, board x,y; h text height)
P2: Bottom Overlay "1" at 1722.5,792.5 h28 r180; Bottom Overlay "2" at 1357.5,787.5 h28 r180; Bottom Overlay "19" at 1747.5,347.5 h28 r90; Bottom Overlay "20" at 1417.5,292.5 h28 r90
P5: Top Overlay "1" at 686.15,1592.81 h28